# EAGLE board Haz (EAGLE 6.6.0)
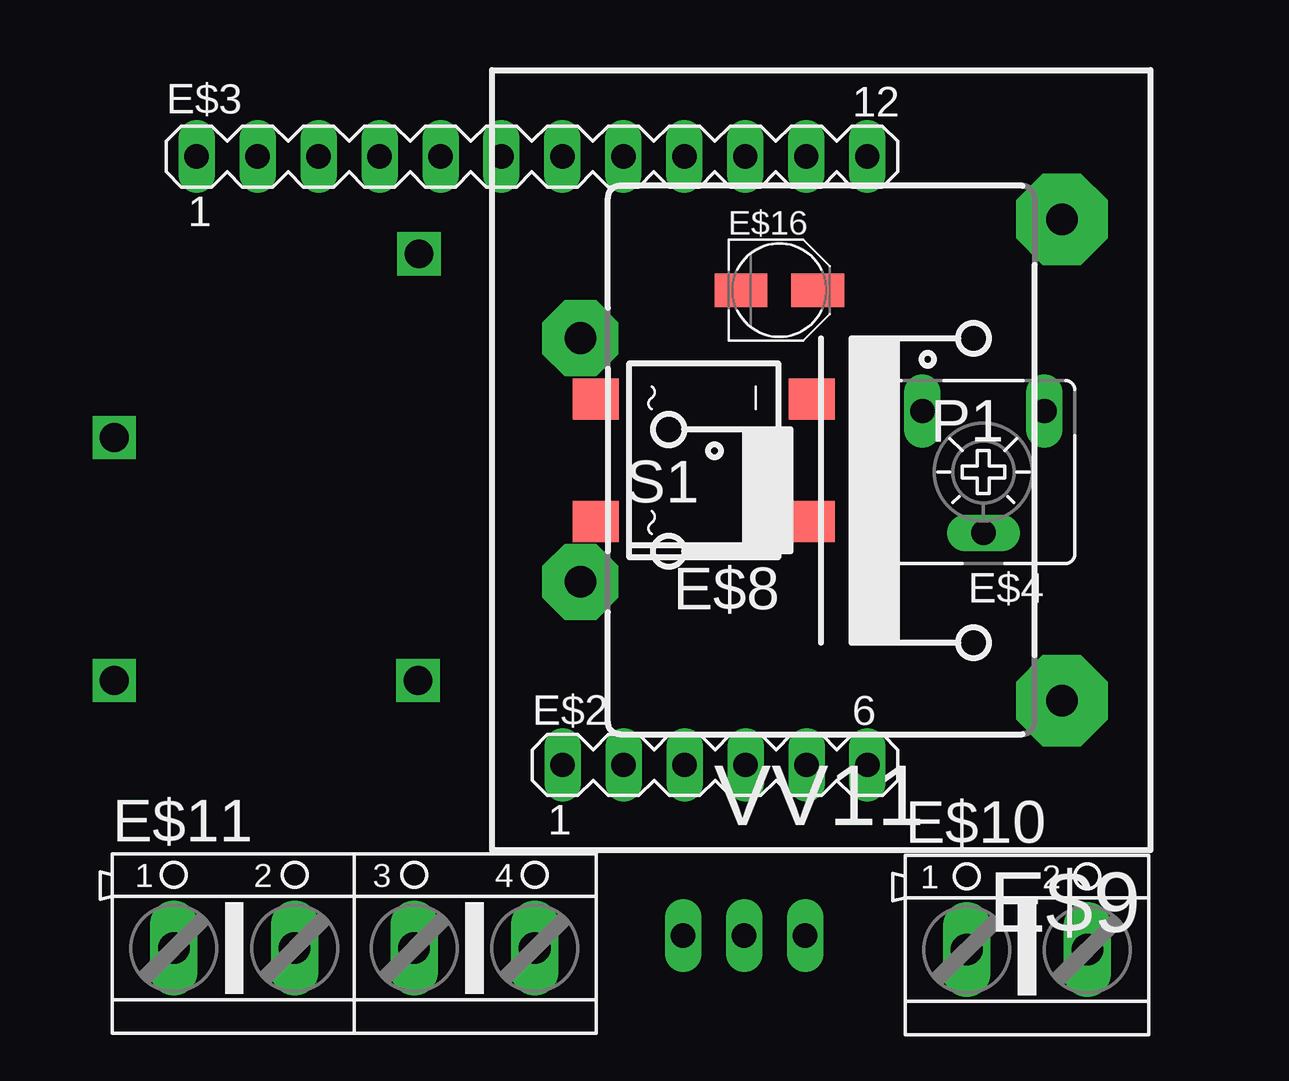
[diagram p0: board, top side]
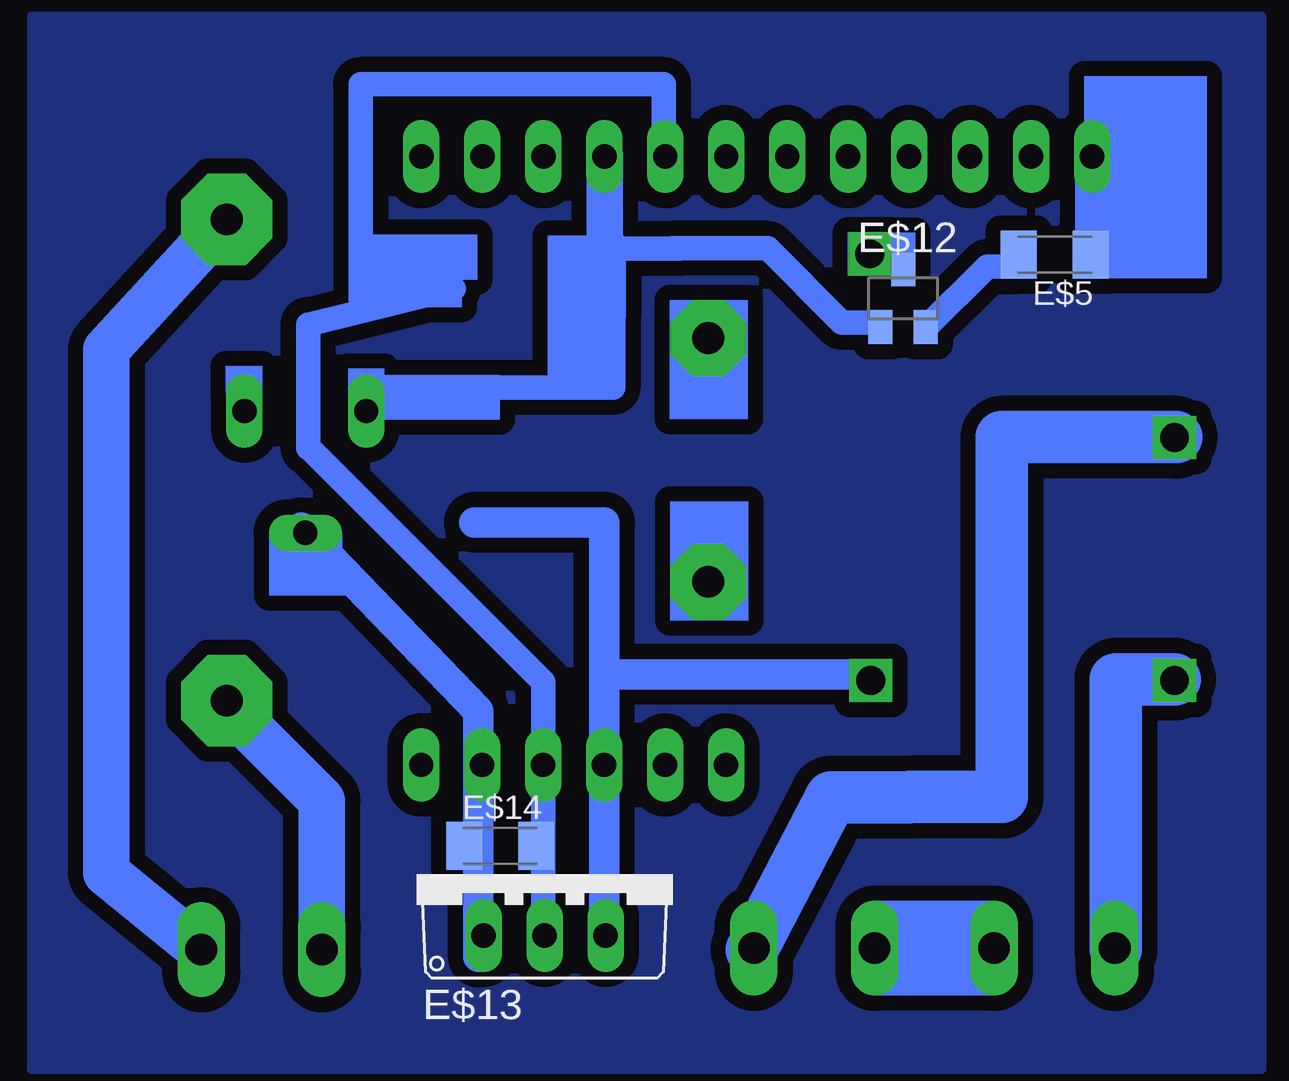
[diagram p1: board, bottom side, seen from below]

No outline drawn. Coordinates in mm, seen from the top.
Copper layers (1*16): Top 0.035mm / dielectric 1.5mm / Bottom 0.035mm
Design rules "default *": minimum track width 10mil, minimum drill 24mil, track to track 25mil, track to pad 25mil, pad to pad 25mil, via to via 25mil, smd to smd 25mil, copper to edge 40mil, drill to drill 8mil, minimum pad ring 10mil, minimum via ring 8mil, stop-mask expansion 4mil, vias tented up to drill 0mil, thermal gap 10mil

## Footprints (pad centres in the part's own frame; a part is rotated, then mirrored left to right if it is on the bottom)
MA06-1 = drill 1.016 long: 1 -6.35,0; 2 -3.81,0; 3 -1.27,0; 4 1.27,0; 5 3.81,0; 6 6.35,0
MA12-1 = drill 1.016 long: 1 -13.97,0; 2 -11.43,0; 3 -8.89,0; 4 -6.35,0; 5 -3.81,0; 6 -1.27,0; 7 1.27,0; 8 3.81,0; 9 6.35,0; 10 8.89,0; 11 11.43,0; 12 13.97,0
CA6V = drill 1.016 long: A -2.54,-2.54; E 2.54,-2.54; S 0,2.54
C1206K = smd 1.5 x 2: 1 -1.5,0; 2 1.5,0
DBS = smd 1.7 x 1.9: + -2.55,-4.5; - 2.55,-4.5; AC1 -2.55,4.5; AC2 2.55,4.5
VV11 = drill 1.321 pad 3.81 octagon: 1 -10.033,10.033; 5 -10.033,-10.033 | drill 1.321 pad 3.175 octagon: 7 10.033,-5.08; 9 10.033,5.08
AK500/2 = drill 1.321 long: 1 -2.515,0; 2 2.515,0
AK500/4 = drill 1.321 long: 1 -7.518,0; 2 -2.489,0; 3 2.489,0; 4 7.518,0
SC59-BEC = smd 1 x 1.4: B -0.95,-1.2; C 0,1.2; E 0.95,-1.2
TO220V = drill 1.016 long: 1 -2.54,-2.54; 2 0,-2.54; 3 2.54,-2.54
PANASONIC_B = smd 2.2 x 1.4: + 1.6,0; - -1.6,0

## Placement (x,y rotation side)
E$2  [MA06-1]  28.67,12.67 0 top
E$3  [MA12-1]  21.04,38.03 0 top
E$4  [CA6V]  39.85,24.88 180 top
E$5  [C1206K]  8.62,33.95 180 bottom
E$8  [DBS]  28.2,25.37 90 top
E$9  [VV11]  33.09,25.38 180 top
E$10  [AK500/2]  41.67,4.97 0 top
E$11  [AK500/4]  13.64,5.03 0 top
E$12  [SC59-BEC]  14.94,32.12 0 bottom
E$13  [TO220V]  29.88,8.1 0 bottom
E$14  [C1206K]  31.73,9.3 0 bottom
E$16  [PANASONIC_B]  31.35,32.46 0 top

## Library data of the parts
E$2 E$3 = con-lstb
E$4 = pot
E$5 E$14 E$16 = resistor
E$8 = rectifier
E$9 = trafo
E$10 E$11 = con-ptr500
E$12 = transistor
E$13 = linear

## Tracks (layer width: path | path; a pad name or v marks a point on that pad's centre or on a via)
S$1
  Bottom 1.27: 40.01,22.56 32.64,14.93 32.64,4.67
S$2
  Bottom 1.27: 27.39,5.61 27.39,22.78 32.8,22.78
S$3
  Bottom 1.93: 43.12,35.45 48.14,29.98 48.14,8.17 44.32,5.04
S$4
  Bottom 1.93: 39.16,4.97 39.16,11.19 43.19,15.22
S$5
  Bottom 2.184: 3.63,16.24 6.08,16.24 6.08,4.99
S$6  (via drill 1.2)
  other vias: 3.63,26.32
S$7  (via drill 1.2)
  other vias: 16.33,33.97
S$8  (via drill 1.2)
  other vias: 16.29,16.19
S$9  (via drill 1.2)
  other vias: 3.63,16.19
S$10
  Bottom 2.184: 21.24,4.97 17.94,11.32 14.7,11.32
S$11
  Bottom 2.184: 3.56,26.33 10.83,26.33 10.83,11.33 14.65,11.33
S$12
  Bottom 1.27: 16.28,16.22 16.28,16.45 27.33,16.45
S$13
  Bottom 1.016: 13.99,30.89 11.43,33.45 10.16,33.45
S$14
  Bottom 1.016: 24.53,34.21 20.59,34.21 17.49,31.11 15.94,31.11
S$15
  Bottom 1.016: 29.94,5.5 29.94,16.13 39.64,25.83
S$16
  Bottom 1.016: 24.25,34.2 27,34.2 27.02,28.41 32.75,28.41 32.75,27.93
S$17
  Bottom 1.016: 39.73,25.88 39.73,31.03 33.67,32.53
S$18
  Bottom 1.016: 24.92,37.96 24.92,41.04 37.54,41.04 37.54,32.06
S$19
  Bottom 1.016: 27.37,38.01 27.4,38.01 27.4,34.45
S$20
  pour Bottom: 0,0 0,43.86 47.92,43.86 51.25,43.86 51.25,29.55 51.25,0
(copper drawn outside any net)
  shapes: Bottom area x18